# EAGLE board homegreen_node_basic v1.4.3_panel (EAGLE 9.6.2), part 1 of 2
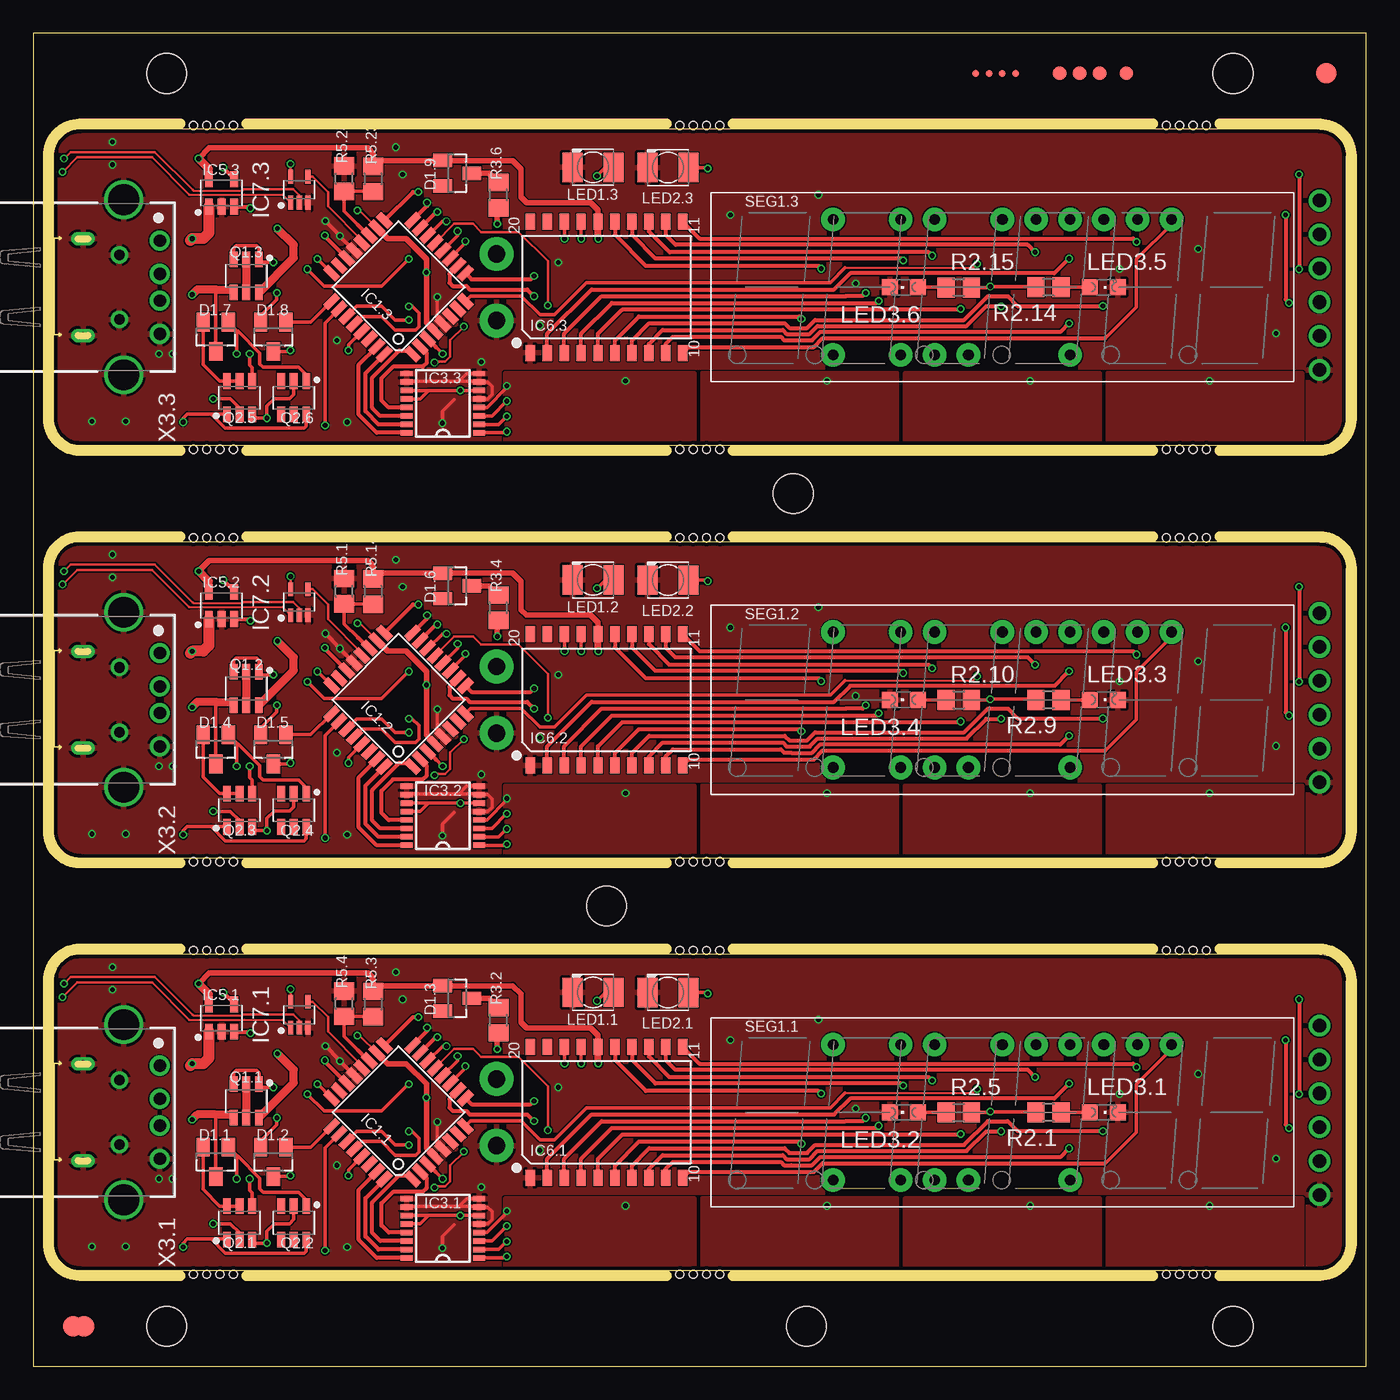
[diagram p0: board, top side]
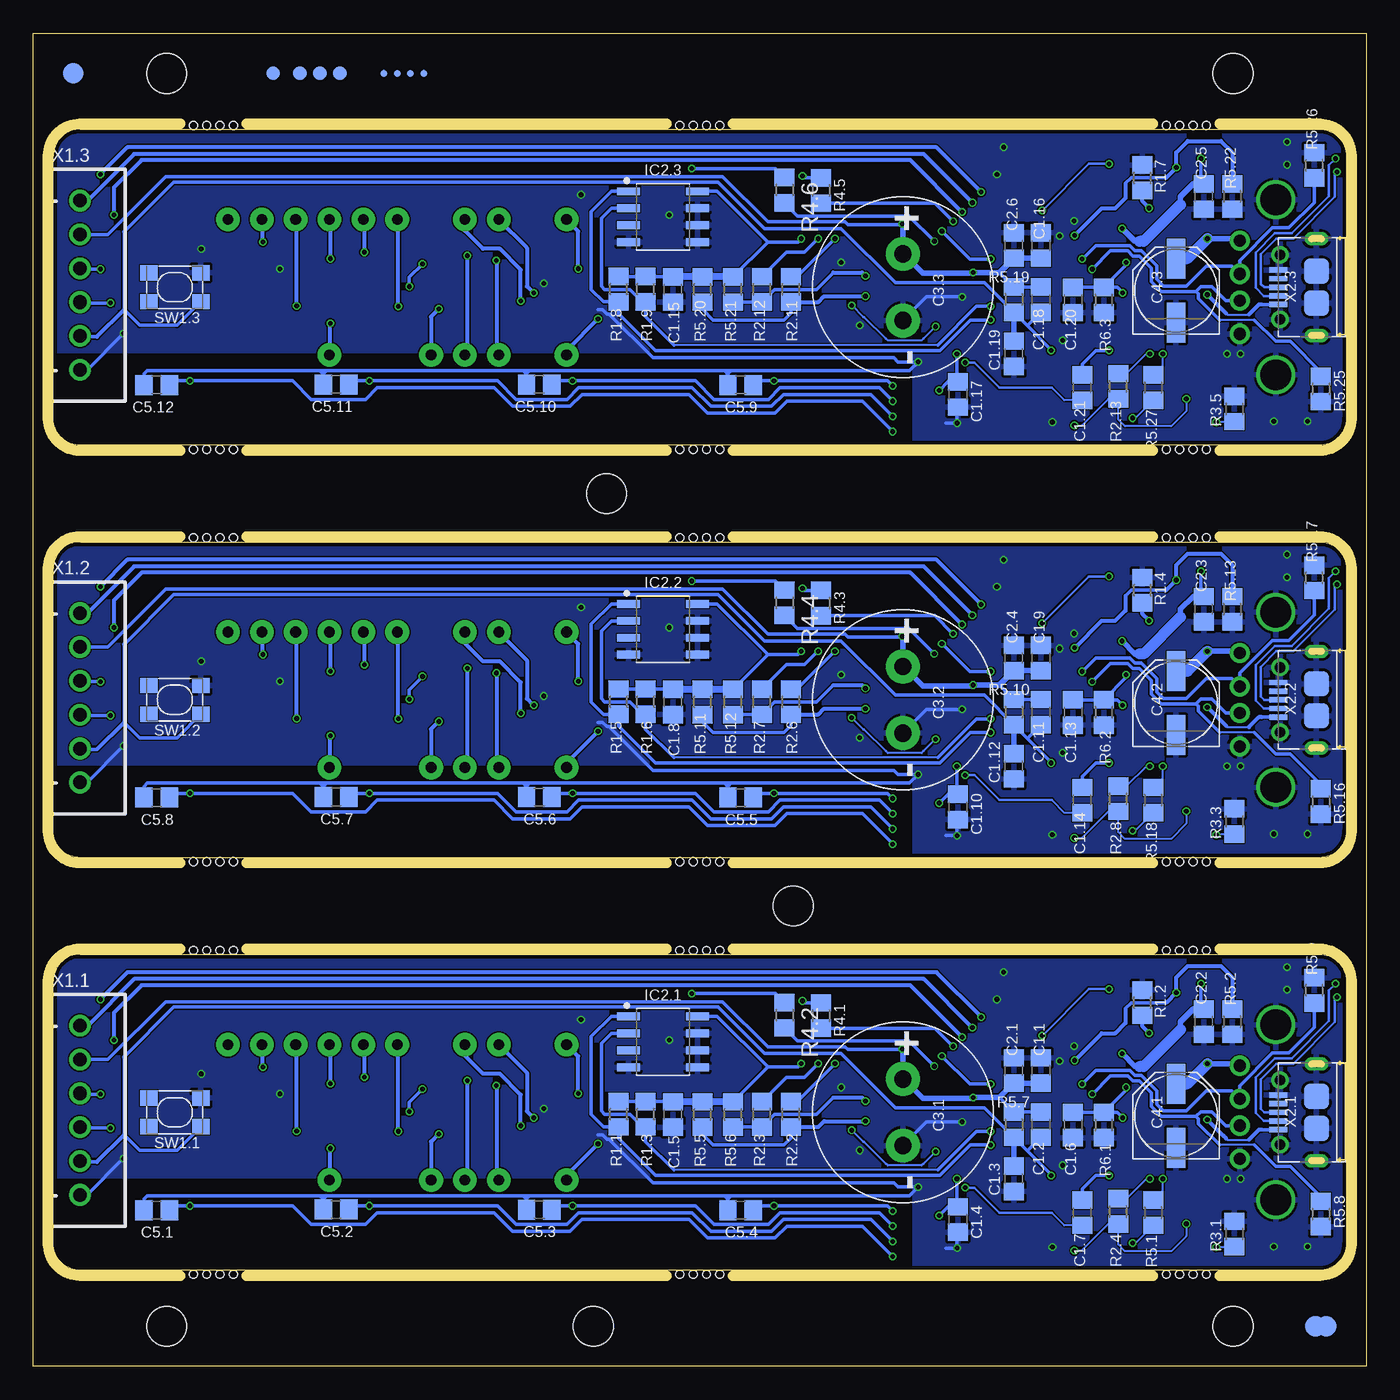
[diagram p1: board, bottom side, seen from below]

Size 100 x 100 mm. Coordinates in mm from the lower left corner, seen from the top.
Outline: 3.5,7.2 96.5,7.2
Outline: 96.5,7.2 arc90 98.5,9.2
Outline: 98.5,9.2 98.5,28.9
Outline: 96.5,30.9 3.5,30.9
Outline: 3.5,30.9 arc90 1.5,28.9
Outline: 1.5,28.9 1.5,9.2
Outline: 1.5,9.2 arc90 3.5,7.2
Outline: 96.5,30.9 arc-90 98.5,28.9
Outline: 3.5,38.15 96.5,38.15
Outline: 96.5,38.15 arc90 98.5,40.15
Outline: 98.5,40.15 98.5,59.85
Outline: 96.5,61.85 3.5,61.85
Outline: 3.5,61.85 arc90 1.5,59.85
Outline: 1.5,59.85 1.5,40.15
Outline: 1.5,40.15 arc90 3.5,38.15
Outline: 96.5,61.85 arc-90 98.5,59.85
Outline: 3.5,69.1 96.5,69.1
Outline: 96.5,69.1 arc90 98.5,71.1
Outline: 98.5,71.1 98.5,90.8
Outline: 96.5,92.8 3.5,92.8
Outline: 3.5,92.8 arc90 1.5,90.8
Outline: 1.5,90.8 1.5,71.1
Outline: 1.5,71.1 arc90 3.5,69.1
Outline: 96.5,92.8 arc-90 98.5,90.8
Outline: 3.5,7.2 96.5,7.2
Outline: 96.5,7.2 arc90 98.5,9.2
Outline: 98.5,9.2 98.5,28.9
Outline: 96.5,30.9 3.5,30.9
Outline: 3.5,30.9 arc90 1.5,28.9
Outline: 1.5,28.9 1.5,9.2
Outline: 1.5,9.2 arc90 3.5,7.2
Outline: 96.5,30.9 arc-90 98.5,28.9
Outline: 3.5,38.15 96.5,38.15
Outline: 96.5,38.15 arc90 98.5,40.15
Outline: 98.5,40.15 98.5,59.85
Outline: 96.5,61.85 3.5,61.85
Outline: 3.5,61.85 arc90 1.5,59.85
Outline: 1.5,59.85 1.5,40.15
Outline: 1.5,40.15 arc90 3.5,38.15
Outline: 96.5,61.85 arc-90 98.5,59.85
Outline: 3.5,69.1 96.5,69.1
Outline: 96.5,69.1 arc90 98.5,71.1
Outline: 98.5,71.1 98.5,90.8
Outline: 96.5,92.8 3.5,92.8
Outline: 3.5,92.8 arc90 1.5,90.8
Outline: 1.5,90.8 1.5,71.1
Outline: 1.5,71.1 arc90 3.5,69.1
Outline: 96.5,92.8 arc-90 98.5,90.8
Outline: 3.5,7.2 96.5,7.2
Outline: 96.5,7.2 arc90 98.5,9.2
Outline: 98.5,9.2 98.5,28.9
Outline: 96.5,30.9 3.5,30.9
Outline: 3.5,30.9 arc90 1.5,28.9
Outline: 1.5,28.9 1.5,9.2
Outline: 1.5,9.2 arc90 3.5,7.2
Outline: 96.5,30.9 arc-90 98.5,28.9
Outline: 3.5,38.15 96.5,38.15
Outline: 96.5,38.15 arc90 98.5,40.15
Outline: 98.5,40.15 98.5,59.85
Outline: 96.5,61.85 3.5,61.85
Outline: 3.5,61.85 arc90 1.5,59.85
Outline: 1.5,59.85 1.5,40.15
Outline: 1.5,40.15 arc90 3.5,38.15
Outline: 96.5,61.85 arc-90 98.5,59.85
Outline: 3.5,69.1 96.5,69.1
Outline: 96.5,69.1 arc90 98.5,71.1
Outline: 98.5,71.1 98.5,90.8
Outline: 96.5,92.8 3.5,92.8
Outline: 3.5,92.8 arc90 1.5,90.8
Outline: 1.5,90.8 1.5,71.1
Outline: 1.5,71.1 arc90 3.5,69.1
Outline: 96.5,92.8 arc-90 98.5,90.8
Outline: 0,0 100,0 100,100 0,100 0,0
Copper layers (1*16): Top 0.035mm / dielectric 1.5mm / Bottom 0.035mm
Design rules "seeed_advanced_2layer": minimum track width 4mil, minimum drill 0.2mm, track to track 4mil, track to pad 4mil, pad to pad 4mil, via to via 12mil, smd to smd 4mil, copper to edge 0.3mm, drill to drill 0.2mm, minimum pad ring 0.1mm, minimum via ring 0.1mm, stop-mask expansion 0.1mm, vias tented up to drill 0mil, thermal gap 0.2mm
Holes 0.6 mm at 13,62.15 14,62.15 49.5,62.15 50.5,62.15 86,62.15 87,62.15 86,37.85 87,37.85 49.5,37.85 50.5,37.85 13,37.85 14,37.85 13,93.1 14,93.1 49.5,93.1 50.5,93.1 86,93.1 87,93.1 86,68.8 87,68.8 49.5,68.8 50.5,68.8 13,68.8 14,68.8 13,31.2 14,31.2 49.5,31.2 50.5,31.2 86,31.2 87,31.2 86,6.9 87,6.9 49.5,6.9 50.5,6.9 13,6.9 14,6.9 12,93.1 15,93.1 48.5,93.1 51.5,93.1 85,93.1 88,93.1 12,68.8 15,68.8 48.5,68.8 51.5,68.8 85,68.8 88,68.8 12,62.15 15,62.15 48.5,62.15 51.5,62.15 85,62.15 88,62.15 85,37.85 88,37.85 48.5,37.85 51.5,37.85 12,37.85 15,37.85 12,31.2 15,31.2 48.5,31.2 51.5,31.2 85,31.2 88,31.2 85,6.9 88,6.9 48.5,6.9 51.5,6.9 12,6.9 15,6.9
Holes 3 mm at 57,65.47 43,34.52 58,3 10,3 90,3 10,97 90,97
Milling: 42 lines

## Footprints (pad centres in the part's own frame; a part is rotated, then mirrored left to right if it is on the bottom)
C0805 = smd 1.3 x 1.5: 1 -0.95,0; 2 0.95,0
C_FYD0H104ZF = drill 1.3 pad 2.54: + -2.5,0; - 2.5,0
PANASONIC_D = smd 3 x 1.4: + 2.4,0; - -2.4,0
SOT23 = smd 1 x 1.4: 1 -0.95,-1.1; 2 0.95,-1.1; 3 0,1.1
FID_060_P = smd 1.524 x 1.524 bottom: FIDB 0,0 | smd 1.524 x 1.524: FIDT 0,0
FID_040_P = smd 1.016 x 1.016 bottom: FIDB 0,0 | smd 1.016 x 1.016: FIDT 0,0
FID_020_P = smd 0.508 x 0.508 bottom: FIDB 0,0 | smd 0.508 x 0.508: FIDT 0,0
TQFP32-08 = smd 1.27 x 0.559: 1 -4.293,2.8; 2 -4.293,2; 3 -4.293,1.2; 4 -4.293,0.4; 5 -4.293,-0.4; 6 -4.293,-1.2; 7 -4.293,-2; 8 -4.293,-2.8; 17 4.293,-2.8; 18 4.293,-2; 19 4.293,-1.2; 20 4.293,-0.4; 21 4.293,0.4; 22 4.293,1.2; 23 4.293,2; 24 4.293,2.8 | smd 0.559 x 1.27: 9 -2.8,-4.293; 10 -2,-4.293; 11 -1.2,-4.293; 12 -0.4,-4.293; 13 0.4,-4.293; 14 1.2,-4.293; 15 2,-4.293; 16 2.8,-4.293; 25 2.8,4.293; 26 2,4.293; 27 1.2,4.293; 28 0.4,4.293; 29 -0.4,4.293; 30 -1.2,4.293; 31 -2,4.293; 32 -2.8,4.293
SO8 = smd 1.746 x 0.592: 1 -2.585,1.905; 2 -2.585,0.635; 3 -2.585,-0.635; 4 -2.585,-1.905; 5 2.585,-1.905; 6 2.585,-0.635; 7 2.585,0.635; 8 2.585,1.905
SSOP16 = smd 0.914 x 0.406: 1 -2.718,2.223; 2 -2.718,1.587; 3 -2.718,0.953; 4 -2.718,0.318; 5 -2.718,-0.318; 6 -2.718,-0.953; 7 -2.718,-1.587; 8 -2.718,-2.223; 9 2.718,-2.223; 10 2.718,-1.587; 11 2.718,-0.953; 12 2.718,-0.318; 13 2.718,0.318; 14 2.718,0.953; 15 2.718,1.587; 16 2.718,2.223
SOT23-5 = smd 1.18 x 0.589: 1 -1.024,0.95; 2 -1.024,0; 3 -1.024,-0.95; 4 1.024,-0.95; 5 1.024,0.95
SOP20-1.27-12.7X7.65MM = smd 0.7 x 1.2: 1 -5.715,-4.925; 2 -4.445,-4.925; 3 -3.175,-4.925; 4 -1.905,-4.925; 5 -0.635,-4.925; 6 0.635,-4.925; 7 1.905,-4.925; 8 3.175,-4.925; 9 4.445,-4.925; 10 5.715,-4.925; 11 5.715,4.925; 12 4.445,4.925; 13 3.175,4.925; 14 1.905,4.925; 15 0.635,4.925; 16 -0.635,4.925; 17 -1.905,4.925; 18 -3.175,4.925; 19 -4.445,4.925; 20 -5.715,4.925
SOT65P212X110-5N = smd 1.025 x 0.397: 1 -0.975,0.65; 2 -0.975,0; 3 -0.975,-0.65; 4 0.975,-0.65; 5 0.975,0.65
KA-3528ASYC = smd 1.5 x 2.2: A -1.55,0; C 1.55,0
CHIPLED_0805 = smd 1.2 x 1.2: A 0,-1.05; C 0,1.05
SOT23-6 = smd 1.171 x 0.589: 1 -1.25,0.95; 2 -1.25,0; 3 -1.25,-0.95; 4 1.25,-0.95; 5 1.25,0; 6 1.25,0.95
R0805 = smd 1.3 x 1.5: 1 -0.95,0; 2 0.95,0
7SEG_6D_FJ3661BH = drill 0.8 pad 1.778: P1 -12.7,-5.08; P3 -7.62,-5.08; P4 -5.08,-5.08; P5 -2.54,-5.08; P8 5.08,-5.08; P12 12.7,5.08; P13 10.16,5.08; P14 7.62,5.08; P15 5.08,5.08; P16 2.54,5.08; P17 0,5.08; P19 -5.08,5.08; P20 -7.62,5.08; P22 -12.7,5.08
SW4-SMD-4.2X3.2X2.5MM = smd 1.3 x 1.15: 1 -1.95,1.075; 2 1.95,1.075; 3 -1.95,-1.075; 4 1.95,-1.075
JST-XH-06-PACKAGE-ROUND-PAD = drill 1.016: 1 -6.35,0; 2 -3.81,0; 3 -1.27,0; 4 1.27,0; 5 3.81,0; 6 6.35,0
ZX62-B-5PA = smd 0.4 x 1.35: 1 -1.3,2.875; 2 -0.65,2.875; 3 0,2.875; 4 0.65,2.875; 5 1.3,2.875 | smd 1.9 x 1.9: P1 -1.2,0; P2 1.2,0 | drill 0.508 pad 1.016 long: P3 -3.625,0; P4 3.625,0 | drill 0.8: P5 -2.425,2.73; P6 2.425,2.73
61400416021 = drill 0.92: 1 -3.5,5.99; 2 -1,5.99; 3 1,5.99; 4 3.5,5.99 | drill 2.3: S1 -6.57,3.28; S2 6.57,3.28

## Placement (x,y rotation side)
C1.1  100n  [C0805]  24.41,22.19 270 bottom
C1.2  100n  [C0805]  24.41,18.12 90 bottom
C1.3  100n  [C0805]  26.44,14.06 90 bottom
C1.4  100n  [C0805]  30.63,11.01 270 bottom
C1.5  100n  [C0805]  52.01,18.88 90 bottom
C1.6  100n  [C0805]  22,18.1 90 bottom
C1.7  100n  [C0805]  21.31,11.52 90 bottom
C1.8  100n  [C0805]  52.01,49.83 90 bottom
C1.9  100n  [C0805]  24.41,53.14 270 bottom
C1.10  100n  [C0805]  30.63,41.96 270 bottom
C1.11  100n  [C0805]  24.41,49.07 90 bottom
C1.12  100n  [C0805]  26.44,45.01 90 bottom
C1.13  100n  [C0805]  22,49.05 90 bottom
C1.14  100n  [C0805]  21.31,42.47 90 bottom
C1.15  100n  [C0805]  52.01,80.78 90 bottom
C1.16  100n  [C0805]  24.41,84.09 270 bottom
C1.17  100n  [C0805]  30.63,72.91 270 bottom
C1.18  100n  [C0805]  24.41,80.02 90 bottom
C1.19  100n  [C0805]  26.44,75.96 90 bottom
C1.20  100n  [C0805]  22,80 90 bottom
C1.21  100n  [C0805]  21.31,73.42 90 bottom
C2.1  10u  [C0805]  26.44,22.19 270 bottom
C2.2  10u  [C0805]  12.2,25.85 90 bottom
C2.3  10u  [C0805]  12.2,56.8 90 bottom
C2.4  10u  [C0805]  26.44,53.14 270 bottom
C2.5  10u  [C0805]  12.2,87.75 90 bottom
C2.6  10u  [C0805]  26.44,84.09 270 bottom
C3.1  0.33F  [C_FYD0H104ZF]  34.75,19.05 270 bottom
C3.2  0.33F  [C_FYD0H104ZF]  34.75,50 270 bottom
C3.3  0.33F  [C_FYD0H104ZF]  34.75,80.95 270 bottom
C4.1  330u  [PANASONIC_D]  14.26,18.8 90 bottom
C4.2  330u  [PANASONIC_D]  14.26,49.75 90 bottom
C4.3  330u  [PANASONIC_D]  14.26,80.7 90 bottom
C5.1  5p  [C0805]  90.74,11.71 180 bottom
C5.2  5p  [C0805]  77.28,11.76 180 bottom
C5.3  5p  [C0805]  62.04,11.75 180 bottom
C5.4  5p  [C0805]  46.93,11.71 180 bottom
C5.5  5p  [C0805]  46.93,42.66 180 bottom
C5.6  5p  [C0805]  62.04,42.7 180 bottom
C5.7  5p  [C0805]  77.28,42.71 180 bottom
C5.8  5p  [C0805]  90.74,42.66 180 bottom
C5.9  5p  [C0805]  46.93,73.61 180 bottom
C5.10  5p  [C0805]  62.04,73.65 180 bottom
C5.11  5p  [C0805]  77.28,73.66 180 bottom
C5.12  5p  [C0805]  90.74,73.61 180 bottom
D1.1  BAT54S  [SOT23]  13.69,15.33 180 top
D1.2  BAT54S  [SOT23]  18.01,15.33 180 top
D1.3  BAT54S  [SOT23]  31.8,27.6 270 top
D1.4  BAT54S  [SOT23]  13.69,46.28 180 top
D1.5  BAT54S  [SOT23]  18.01,46.28 180 top
D1.6  BAT54S  [SOT23]  31.8,58.55 270 top
D1.7  BAT54S  [SOT23]  13.69,77.23 180 top
D1.8  BAT54S  [SOT23]  18.01,77.23 180 top
D1.9  BAT54S  [SOT23]  31.8,89.5 270 top
E$1  [FID_060_P]  3,3 0 top
E$2  [FID_060_P]  3.8,3 0 top
E$3  [FID_060_P]  97,97 0 top
E$4  [FID_040_P]  82,97 0 top
E$5  [FID_040_P]  80,97 0 top
E$6  [FID_040_P]  78.5,97 0 top
E$7  [FID_040_P]  77,97 0 top
E$8  [FID_020_P]  73.7,97 0 top
E$9  [FID_020_P]  72.7,97 0 top
E$10  [FID_020_P]  71.7,97 0 top
E$11  [FID_020_P]  70.7,97 0 top
IC1.1  attiny88-AU  [TQFP32-08]  27.4,19.05 135 top
IC1.2  attiny88-AU  [TQFP32-08]  27.4,50 135 top
IC1.3  attiny88-AU  [TQFP32-08]  27.4,80.95 135 top
IC2.1  LM75B  [SO8]  52.76,24.34 0 bottom
IC2.2  LM75B  [SO8]  52.76,55.29 0 bottom
IC2.3  LM75B  [SO8]  52.76,86.24 0 bottom
IC3.1  TTP224NS  [SSOP16]  30.73,10.35 180 top
IC3.2  TTP224NS  [SSOP16]  30.73,41.3 180 top
IC3.3  TTP224NS  [SSOP16]  30.73,72.25 180 top
IC5.1  MT9700_WS4603  [SOT23-5]  14.12,26.12 90 top
IC5.2  MT9700_WS4603  [SOT23-5]  14.12,57.07 90 top
IC5.3  MT9700_WS4603  [SOT23-5]  14.12,88.02 90 top
IC6.1  TM1637-sop20  [SOP20-1.27-12.7X7.65MM]  43,19.05 0 top
IC6.2  TM1637-sop20  [SOP20-1.27-12.7X7.65MM]  43,50 0 top
IC6.3  TM1637-sop20  [SOP20-1.27-12.7X7.65MM]  43,80.95 0 top
IC7.1  74AHC1G66  [SOT65P212X110-5N]  19.95,26.36 90 top
IC7.2  74AHC1G66  [SOT65P212X110-5N]  19.95,57.31 90 top
IC7.3  74AHC1G66  [SOT65P212X110-5N]  19.95,88.26 90 top
LED1.1  green  [KA-3528ASYC]  41.99,28.05 180 top
LED1.2  green  [KA-3528ASYC]  41.99,59 180 top
LED1.3  green  [KA-3528ASYC]  41.99,89.95 180 top
LED2.1  red  [KA-3528ASYC]  47.62,28.03 180 top
LED2.2  red  [KA-3528ASYC]  47.62,58.98 180 top
LED2.3  red  [KA-3528ASYC]  47.62,89.93 180 top
LED3.1  white  [CHIPLED_0805]  80.3,19.05 270 top
LED3.2  white  [CHIPLED_0805]  65.3,19.05 90 top
LED3.3  white  [CHIPLED_0805]  80.3,50 270 top
LED3.4  white  [CHIPLED_0805]  65.3,50 90 top
LED3.5  white  [CHIPLED_0805]  80.3,80.95 270 top
LED3.6  white  [CHIPLED_0805]  65.3,80.95 90 top
Q1.1  WST2011  [SOT23-6]  15.98,19.9 270 top
Q1.2  WST2011  [SOT23-6]  15.98,50.85 270 top
Q1.3  WST2011  [SOT23-6]  15.98,81.8 270 top
Q2.1  BC817DPN  [SOT23-6]  15.47,10.76 90 top
Q2.2  BC817DPN  [SOT23-6]  19.53,10.76 270 top
Q2.3  BC817DPN  [SOT23-6]  15.47,41.71 90 top
Q2.4  BC817DPN  [SOT23-6]  19.53,41.71 270 top
Q2.5  BC817DPN  [SOT23-6]  15.47,72.66 90 top
Q2.6  BC817DPN  [SOT23-6]  19.53,72.66 270 top
R1.1  6k8  [R0805]  56.09,18.91 90 bottom
R1.2  6k8  [R0805]  16.79,27.27 90 bottom
R1.3  6k8  [R0805]  54.06,18.91 90 bottom
R1.4  6k8  [R0805]  16.79,58.22 90 bottom
R1.5  6k8  [R0805]  56.09,49.86 90 bottom
R1.6  6k8  [R0805]  54.06,49.86 90 bottom
R1.7  6k8  [R0805]  16.79,89.17 90 bottom
R1.8  6k8  [R0805]  56.09,80.81 90 bottom
R1.9  6k8  [R0805]  54.06,80.81 90 bottom
R2.1  1k  [R0805]  76.17,19.04 180 top
R2.2  1k  [R0805]  43.16,18.9 90 bottom
R2.3  1k  [R0805]  45.34,18.9 90 bottom
R2.4  1k  [R0805]  18.6,11.62 90 bottom
R2.5  1k  [R0805]  69.43,19.04 0 top
R2.6  1k  [R0805]  43.16,49.85 90 bottom
R2.7  1k  [R0805]  45.34,49.85 90 bottom
R2.8  1k  [R0805]  18.6,42.57 90 bottom
R2.9  1k  [R0805]  76.17,49.99 180 top
R2.10  1k  [R0805]  69.43,49.99 0 top
R2.11  1k  [R0805]  43.16,80.8 90 bottom
R2.12  1k  [R0805]  45.34,80.8 90 bottom
R2.13  1k  [R0805]  18.6,73.52 90 bottom
R2.14  1k  [R0805]  76.17,80.94 180 top
R2.15  1k  [R0805]  69.43,80.94 0 top
R3.1  47  [R0805]  9.88,9.92 270 bottom
R3.2  47  [R0805]  34.9,25.96 90 top
R3.3  47  [R0805]  9.88,40.87 270 bottom
R3.4  47  [R0805]  34.9,56.91 90 top
R3.5  47  [R0805]  9.88,71.82 270 bottom
R3.6  47  [R0805]  34.9,87.86 90 top
R4.1  3k  [R0805]  40.9,26.3 270 bottom
R4.2  3k  [R0805]  43.64,26.34 270 bottom
R4.3  3k  [R0805]  40.9,57.25 270 bottom
R4.4  3k  [R0805]  43.64,57.29 270 bottom
R4.5  3k  [R0805]  40.9,88.2 270 bottom
R4.6  3k  [R0805]  43.64,88.24 270 bottom
R5.1  100k  [R0805]  15.98,11.52 270 bottom
R5.2  100k  [R0805]  10.06,25.85 270 bottom
R5.3  100k  [R0805]  25.48,27.17 270 top
R5.4  100k  [R0805]  23.32,27.19 90 top
R5.5  100k  [R0805]  49.79,18.88 90 bottom
R5.6  100k  [R0805]  47.51,18.88 90 bottom
R5.7  100k  [R0805]  26.44,18.12 270 bottom
R5.8  100k  [R0805]  3.4,11.42 270 bottom
R5.9  100k  [R0805]  3.89,28.2 90 bottom
R5.10  100k  [R0805]  26.44,49.07 270 bottom
R5.11  100k  [R0805]  49.79,49.83 90 bottom
R5.12  100k  [R0805]  47.51,49.83 90 bottom
R5.13  100k  [R0805]  10.06,56.8 270 bottom
R5.14  100k  [R0805]  25.48,58.12 270 top
R5.15  100k  [R0805]  23.32,58.14 90 top
R5.16  100k  [R0805]  3.4,42.37 270 bottom
R5.17  100k  [R0805]  3.89,59.15 90 bottom
R5.18  100k  [R0805]  15.98,42.47 270 bottom
R5.19  100k  [R0805]  26.44,80.02 270 bottom
R5.20  100k  [R0805]  49.79,80.78 90 bottom
R5.21  100k  [R0805]  47.51,80.78 90 bottom
R5.22  100k  [R0805]  10.06,87.75 270 bottom
R5.23  100k  [R0805]  25.48,89.07 270 top
R5.24  100k  [R0805]  23.32,89.09 90 top
R5.25  100k  [R0805]  3.4,73.32 270 bottom
R5.26  100k  [R0805]  3.89,90.1 90 bottom
R5.27  100k  [R0805]  15.98,73.42 270 bottom
R6.1  1M  [R0805]  19.7,18.1 270 bottom
R6.2  1M  [R0805]  19.7,49.05 270 bottom
R6.3  1M  [R0805]  19.7,80 270 bottom
SEG1.1  7-SEGMENT-6DIGIT-FJ3661BH  [7SEG_6D_FJ3661BH]  72.7,19.05 0 top
SEG1.2  7-SEGMENT-6DIGIT-FJ3661BH  [7SEG_6D_FJ3661BH]  72.7,50 0 top
SEG1.3  7-SEGMENT-6DIGIT-FJ3661BH  [7SEG_6D_FJ3661BH]  72.7,80.95 0 top
SW1.1  DHT-4235A  [SW4-SMD-4.2X3.2X2.5MM]  89.38,19.05 180 bottom
SW1.2  DHT-4235A  [SW4-SMD-4.2X3.2X2.5MM]  89.38,50 180 bottom
SW1.3  DHT-4235A  [SW4-SMD-4.2X3.2X2.5MM]  89.38,80.95 180 bottom
X1.1  JST-XH-06-PIN-ROUND-PAD  [JST-XH-06-PACKAGE-ROUND-PAD]  96.5,19.2 270 bottom
X1.2  JST-XH-06-PIN-ROUND-PAD  [JST-XH-06-PACKAGE-ROUND-PAD]  96.5,50.15 270 bottom
X1.3  JST-XH-06-PIN-ROUND-PAD  [JST-XH-06-PACKAGE-ROUND-PAD]  96.5,81.1 270 bottom
X2.1  ZX62-B-5PA  [ZX62-B-5PA]  3.73,19.05 90 bottom
X2.2  ZX62-B-5PA  [ZX62-B-5PA]  3.73,50 90 bottom
X2.3  ZX62-B-5PA  [ZX62-B-5PA]  3.73,80.95 90 bottom
X3.1  61400416021  [61400416021]  3.5,19.05 270 top
X3.2  61400416021  [61400416021]  3.5,50 270 top
X3.3  61400416021  [61400416021]  3.5,80.95 270 top

## Library data of the parts
C1.1-C1.21 C2.1-C2.6 C4.1-C4.3 C5.1-C5.12 = rcl; SPICEPREFIX: C
C3.1-C3.3 E$1-E$11 IC1.1-IC1.3 IC2.1-IC2.3 IC3.1-IC3.3 IC5.1-IC5.3 IC7.1-IC7.3 Q1.1-Q1.3 Q2.1-Q2.6 SEG1.1-SEG1.3 X1.1-X1.3 = philmalessa
D1.1-D1.9 = diode
IC6.1-IC6.3 = philmalessa; MPN: TM1637
LED1.1-LED1.3 LED2.1-LED2.3 LED3.1-LED3.6 = led
R1.1-R1.9 R2.1-R2.15 R3.1-R3.6 R4.1-R4.6 R5.1-R5.27 R6.1-R6.3 = rcl; SPICEPREFIX: R
SW1.1-SW1.3 = philmalessa; MPN: DHT-4235A
X2.1-X2.3 = philmalessa; MPN: ZX62-B-5PA
X3.1-X3.3 = Wurth_Connectors_WR-USB; APPLICATION: USB 2.0; DATASHEET-URL: https://www.we-online.com/catalog/datasheet/61400416021.pdf; GERDER: Receptacle; INTERFACE-TYPE: Type A; IR1: 1.5A; MOUNT: THT; PACKAGING: Tray; PART-NUMBER: 61400416021; PINS: 4; TYPE: Horizontal; WORKING-VOLTAGE: 30V(AC)

## Nets
!EN_PB: D1.2.1 IC1.1.25
!EN_PB1: D1.5.1 IC1.2.25
!EN_PB2: D1.8.1 IC1.3.25
+5V: C1.5.2 C2.2.2 D1.3.1 IC2.1.8 IC5.1.5 IC6.1.16 Q1.1.6 R1.1.2 R1.3.2 R5.3.1 R5.5.2 R5.6.2
+5V1: C1.8.2 C2.3.2 D1.6.1 IC2.2.8 IC5.2.5 IC6.2.16 Q1.2.6 R1.5.2 R1.6.2 R5.11.2 R5.12.2 R5.14.1
+5V2: C1.15.2 C2.5.2 D1.9.1 IC2.3.8 IC5.3.5 IC6.3.16 Q1.3.6 R1.8.2 R1.9.2 R5.20.2 R5.21.2 R5.23.1
BAT_PWR: C1.1.2 C1.2.2 C2.1.2 C3.1.+ IC1.1.4 IC1.1.18 IC7.1.5 R3.2.1 R5.7.1 X1.1.2
BAT_PWR1: C1.9.2 C1.11.2 C2.4.2 C3.2.+ IC1.2.4 IC1.2.18 IC7.2.5 R3.4.1 R5.10.1 X1.2.2
BAT_PWR2: C1.16.2 C1.18.2 C2.6.2 C3.3.+ IC1.3.4 IC1.3.18 IC7.3.5 R3.6.1 R5.19.1 X1.3.2
BTN_LED: IC1.1.8 R2.1.2 R2.5.2
BTN_LED1: IC1.2.8 R2.9.2 R2.10.2
BTN_LED2: IC1.3.8 R2.14.2 R2.15.2
BUT_MAN: IC1.1.2 IC3.1.13
BUT_MAN1: IC1.2.2 IC3.2.13
BUT_MAN2: IC1.3.2 IC3.3.13
BUT_MIN: IC1.1.1 IC3.1.14
BUT_MIN1: IC1.2.1 IC3.2.14
BUT_MIN2: IC1.3.1 IC3.3.14
BUT_PLUS: IC1.1.31 IC3.1.16
BUT_PLUS1: IC1.2.31 IC3.2.16
BUT_PLUS2: IC1.3.31 IC3.3.16
BUT_SET: IC1.1.32 IC3.1.15
BUT_SET1: IC1.2.32 IC3.2.15
BUT_SET2: IC1.3.32 IC3.3.15
DIG1: IC6.1.15 SEG1.1.P22
DIG2: IC6.1.14 SEG1.1.P3
DIG3: IC6.1.13 SEG1.1.P4
DIG4: IC6.1.12 SEG1.1.P16
DIG5: IC6.1.11 SEG1.1.P13
DIG6: IC6.1.10 SEG1.1.P12
DIG7: IC6.2.10 SEG1.2.P12
DIG8: IC6.2.11 SEG1.2.P13
DIG9: IC6.2.12 SEG1.2.P16
DIG10: IC6.2.13 SEG1.2.P4
DIG11: IC6.2.14 SEG1.2.P3
DIG12: IC6.2.15 SEG1.2.P22
DIG13: IC6.3.10 SEG1.3.P12
DIG14: IC6.3.11 SEG1.3.P13
DIG15: IC6.3.12 SEG1.3.P16
DIG16: IC6.3.13 SEG1.3.P4
DIG17: IC6.3.14 SEG1.3.P3
DIG18: IC6.3.15 SEG1.3.P22
EN_CLK: C1.7.1 IC1.1.13
EN_CLK1: C1.14.1 IC1.2.13
EN_CLK2: C1.21.1 IC1.3.13
EN_LOAD: IC1.1.26 Q2.1.2 R2.4.1
EN_LOAD1: IC1.2.26 Q2.3.2 R2.8.1
EN_LOAD2: IC1.3.26 Q2.5.2 R2.13.1
GND: C1.1.1 C1.3.1 C1.4.2 C1.5.1 C1.6.1 C2.1.1 C2.2.1 C3.1.- C4.1.- C5.1.2 C5.2.2 C5.3.2 C5.4.2 IC1.1.5 IC1.1.21 IC2.1.4 IC2.1.5 IC2.1.6 IC2.1.7 IC3.1.5 IC3.1.7 IC3.1.8 IC3.1.9 IC3.1.10 IC5.1.2 IC6.1.1 IC7.1.3 LED1.1.C LED2.1.C LED3.1.C LED3.2.C R1.2.2 R3.1.1 R5.2.2 R5.4.2 R5.8.2 R5.9.2 R6.1.2 SW1.1.3 X1.1.6 X2.1.5 X2.1.P1 X2.1.P2 X2.1.P3 X2.1.P4 X2.1.P5 X2.1.P6 X3.1.4 X3.1.S1 X3.1.S2
GND1: C1.8.1 C1.9.1 C1.10.2 C1.12.1 C1.13.1 C2.3.1 C2.4.1 C3.2.- C4.2.- C5.5.2 C5.6.2 C5.7.2 C5.8.2 IC1.2.5 IC1.2.21 IC2.2.4 IC2.2.5 IC2.2.6 IC2.2.7 IC3.2.5 IC3.2.7 IC3.2.8 IC3.2.9 IC3.2.10 IC5.2.2 IC6.2.1 IC7.2.3 LED1.2.C LED2.2.C LED3.3.C LED3.4.C R1.4.2 R3.3.1 R5.13.2 R5.15.2 R5.16.2 R5.17.2 R6.2.2 SW1.2.3 X1.2.6 X2.2.5 X2.2.P1 X2.2.P2 X2.2.P3 X2.2.P4 X2.2.P5 X2.2.P6 X3.2.4 X3.2.S1 X3.2.S2
GND2: C1.15.1 C1.16.1 C1.17.2 C1.19.1 C1.20.1 C2.5.1 C2.6.1 C3.3.- C4.3.- C5.9.2 C5.10.2 C5.11.2 C5.12.2 IC1.3.5 IC1.3.21 IC2.3.4 IC2.3.5 IC2.3.6 IC2.3.7 IC3.3.5 IC3.3.7 IC3.3.8 IC3.3.9 IC3.3.10 IC5.3.2 IC6.3.1 IC7.3.3 LED1.3.C LED2.3.C LED3.5.C LED3.6.C R1.7.2 R3.5.1 R5.22.2 R5.24.2 R5.25.2 R5.26.2 R6.3.2 SW1.3.3 X1.3.6 X2.3.5 X2.3.P1 X2.3.P2 X2.3.P3 X2.3.P4 X2.3.P5 X2.3.P6 X3.3.4 X3.3.S1 X3.3.S2
LED1: IC1.1.14 R4.1.2
LED2: IC1.1.11 R4.2.2
LED3: IC1.2.11 R4.4.2
LED4: IC1.2.14 R4.3.2
LED5: IC1.3.11 R4.6.2
LED6: IC1.3.14 R4.5.2
MISO: IC1.1.16 X1.1.1
MISO1: IC1.2.16 X1.2.1
MISO2: IC1.3.16 X1.3.1
MOSI: IC1.1.15 X1.1.4
MOSI1: IC1.2.15 X1.2.4
MOSI2: IC1.3.15 X1.3.4
N$1: IC6.1.18 R2.2.2
N$2: C4.1.+ IC5.1.1 X3.1.1
N$3: Q1.1.2 Q1.1.5
N$4: IC6.1.17 R2.3.2
N$5: D1.3.3 R3.2.2
N$6: Q2.1.1 Q2.2.6 R3.1.2
N$7: LED1.1.A R4.1.1
N$8: IC1.1.19 R5.3.2 R5.4.1
N$9: C1.7.2 D1.2.3
N$10: Q2.1.4 R2.4.2
N$11: LED2.1.A R4.2.1
N$12: D1.1.2 Q2.1.5 Q2.1.6
N$13: IC5.1.3 R1.2.1
N$14: D1.1.1 Q2.2.1 R5.1.1
N$15: Q2.1.3 Q2.2.2 R5.1.2
N$16: LED3.1.A R2.1.1
N$17: C1.6.2 D1.2.2 Q1.1.1 Q1.1.3 R6.1.1
N$18: LED3.2.A R2.5.1
N$19: IC5.2.3 R1.4.1
N$20: IC7.1.1 X2.1.3
N$21: IC7.1.2 X2.1.2
N$22: C4.2.+ IC5.2.1 X3.2.1
N$23: D1.6.3 R3.4.2
N$24: LED1.2.A R4.3.1
N$25: IC6.2.18 R2.6.2
N$26: IC6.2.17 R2.7.2
N$27: IC1.2.19 R5.14.2 R5.15.1
N$28: C1.13.2 D1.5.2 Q1.2.1 Q1.2.3 R6.2.1
N$29: Q2.3.1 Q2.4.6 R3.3.2
N$30: D1.4.2 Q2.3.5 Q2.3.6
N$31: D1.4.1 Q2.4.1 R5.18.1
N$32: Q2.3.3 Q2.4.2 R5.18.2
N$33: Q2.3.4 R2.8.2
N$34: Q1.2.2 Q1.2.5
N$35: C1.14.2 D1.5.3
N$36: LED2.2.A R4.4.1
N$37: LED3.3.A R2.9.1
N$38: LED3.4.A R2.10.1
N$39: IC7.2.1 X2.2.3
N$40: IC7.2.2 X2.2.2
N$41: IC5.3.3 R1.7.1
N$42: C4.3.+ IC5.3.1 X3.3.1
N$43: D1.9.3 R3.6.2
N$44: LED1.3.A R4.5.1
N$45: IC6.3.18 R2.11.2
N$46: IC6.3.17 R2.12.2
N$47: IC1.3.19 R5.23.2 R5.24.1
N$48: C1.20.2 D1.8.2 Q1.3.1 Q1.3.3 R6.3.1
N$49: Q2.5.1 Q2.6.6 R3.5.2
N$50: D1.7.2 Q2.5.5 Q2.5.6
N$51: D1.7.1 Q2.6.1 R5.27.1
N$52: Q2.5.3 Q2.6.2 R5.27.2
N$53: Q2.5.4 R2.13.2
N$54: Q1.3.2 Q1.3.5
N$55: C1.21.2 D1.8.3
N$56: LED2.3.A R4.6.1
N$57: LED3.5.A R2.14.1
N$58: LED3.6.A R2.15.1
N$59: IC7.3.1 X2.3.3
N$60: IC7.3.2 X2.3.2
PAD_MAN: C5.4.1 IC3.1.4
PAD_MAN1: C5.5.1 IC3.2.4
PAD_MAN2: C5.9.1 IC3.3.4
PAD_MIN: C5.3.1 IC3.1.3
PAD_MIN1: C5.6.1 IC3.2.3
PAD_MIN2: C5.10.1 IC3.3.3
PAD_PLUS: C5.1.1 IC3.1.1
PAD_PLUS1: C5.8.1 IC3.2.1
PAD_PLUS2: C5.12.1 IC3.3.1
PAD_SET: C5.2.1 IC3.1.2
PAD_SET1: C5.7.1 IC3.2.2
PAD_SET2: C5.11.1 IC3.3.2
PUMP: IC1.1.22 IC5.1.4 R5.2.1
PUMP1: IC1.2.22 IC5.2.4 R5.13.1
PUMP2: IC1.3.22 IC5.3.4 R5.22.1
RESET: C1.2.1 C1.3.2 IC1.1.29 R5.7.2 SW1.1.1 X1.1.5
RESET1: C1.11.1 C1.12.2 IC1.2.29 R5.10.2 SW1.2.1 X1.2.5
RESET2: C1.18.1 C1.19.2 IC1.3.29 R5.19.2 SW1.3.1 X1.3.5
SCK: IC1.1.17 X1.1.3
SCK1: IC1.2.17 X1.2.3
SCK2: IC1.3.17 X1.3.3
SCL: IC1.1.28 IC2.1.2 R1.3.1
SCL1: IC1.2.28 IC2.2.2 R1.6.1
SCL2: IC1.3.28 IC2.3.2 R1.9.1
SDA: IC1.1.27 IC2.1.1 R1.1.1
SDA1: IC1.2.27 IC2.2.1 R1.5.1
SDA2: IC1.3.27 IC2.3.1 R1.8.1
SEG1: IC6.1.2 SEG1.1.P15
SEG2: IC6.1.3 SEG1.1.P20
SEG3: IC6.1.4 SEG1.1.P19
SEG4: IC6.1.5 SEG1.1.P5
SEG5: IC6.1.6 SEG1.1.P1
SEG6: IC6.1.7 SEG1.1.P14
SEG7: IC6.1.8 SEG1.1.P17
SEG8: IC6.1.9 SEG1.1.P8
SEG9: IC6.2.2 SEG1.2.P15
SEG10: IC6.2.3 SEG1.2.P20
SEG11: IC6.2.4 SEG1.2.P19
SEG12: IC6.2.5 SEG1.2.P5
SEG13: IC6.2.6 SEG1.2.P1
SEG14: IC6.2.7 SEG1.2.P14
SEG15: IC6.2.8 SEG1.2.P17
SEG16: IC6.2.9 SEG1.2.P8
SEG17: IC6.3.2 SEG1.3.P15
SEG18: IC6.3.3 SEG1.3.P20
SEG19: IC6.3.4 SEG1.3.P19
SEG20: IC6.3.5 SEG1.3.P5
SEG21: IC6.3.6 SEG1.3.P1
SEG22: IC6.3.7 SEG1.3.P14
SEG23: IC6.3.8 SEG1.3.P17
SEG24: IC6.3.9 SEG1.3.P8
TM_CLK: IC1.1.10 R2.2.1 R5.5.1
TM_CLK1: IC1.2.10 R2.6.1 R5.11.1
TM_CLK2: IC1.3.10 R2.11.1 R5.20.1
TM_DIO: IC1.1.9 R2.3.1 R5.6.1
TM_DIO1: IC1.2.9 R2.7.1 R5.12.1
TM_DIO2: IC1.3.9 R2.12.1 R5.21.1
TOUCH_PWR: C1.4.1 IC1.1.3 IC3.1.6 IC3.1.11 IC3.1.12
TOUCH_PWR1: C1.10.1 IC1.2.3 IC3.2.6 IC3.2.11 IC3.2.12
TOUCH_PWR2: C1.17.1 IC1.3.3 IC3.3.6 IC3.3.11 IC3.3.12
USB1: IC1.1.24 R5.9.1 X3.1.2
USB2: IC1.1.12 R5.8.1 X3.1.3
USB3: IC1.2.24 R5.17.1 X3.2.2
USB4: IC1.2.12 R5.16.1 X3.2.3
USB5: IC1.3.24 R5.26.1 X3.3.2
USB6: IC1.3.12 R5.25.1 X3.3.3
USB_IN_SW: IC1.1.20 IC7.1.4
USB_IN_SW1: IC1.2.20 IC7.2.4
USB_IN_SW2: IC1.3.20 IC7.3.4
VBUS: D1.1.3 Q1.1.4 X2.1.1
VBUS1: D1.4.3 Q1.2.4 X2.2.1
VBUS2: D1.7.3 Q1.3.4 X2.3.1